# EAGLE board Driver (EAGLE 9.6.2)
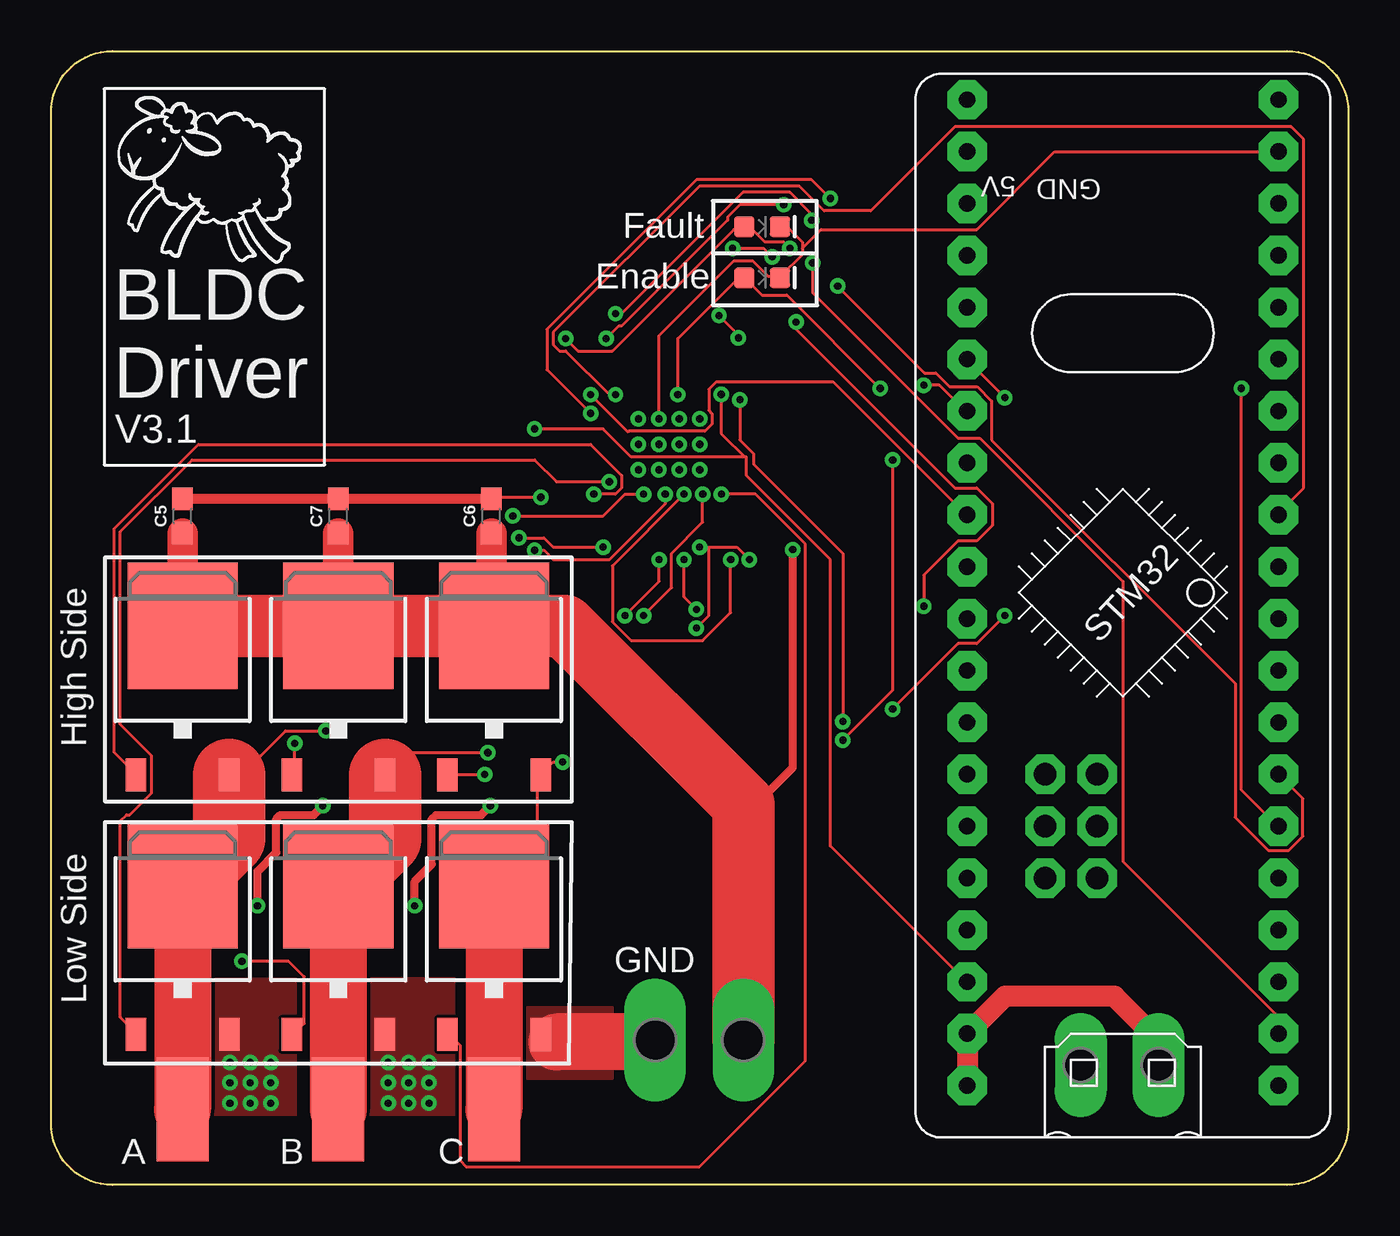
[diagram p0: board, top side]
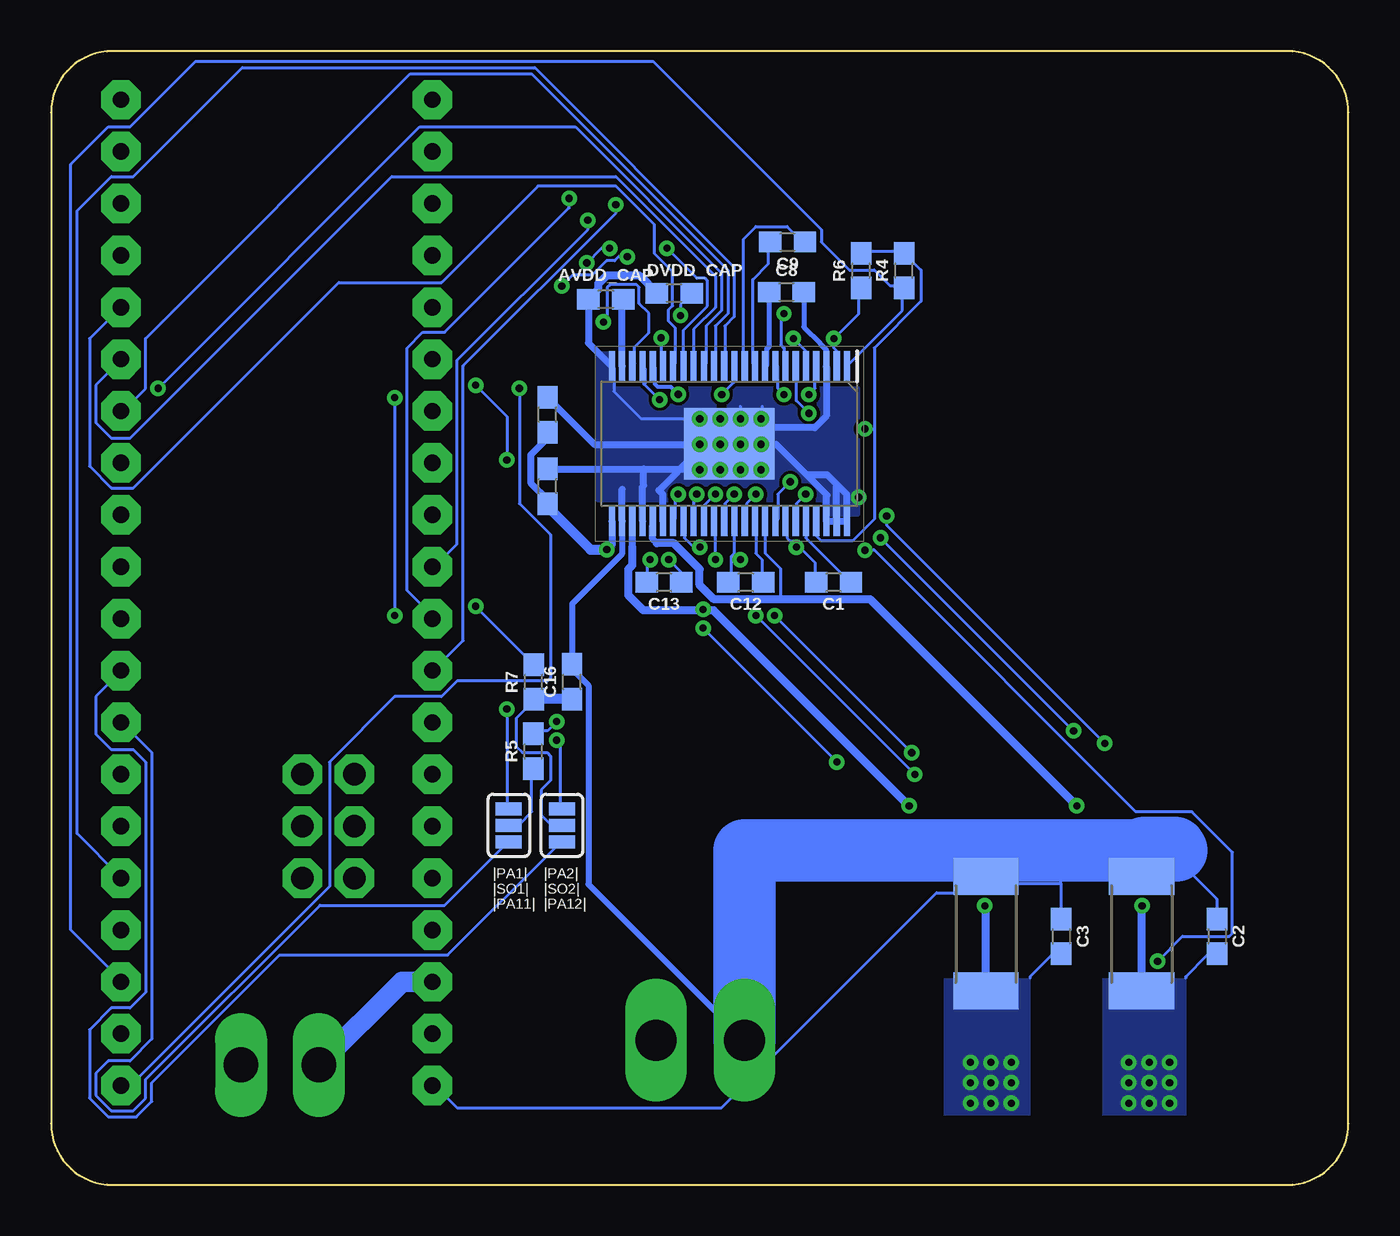
[diagram p1: board, bottom side, seen from below]

Size 63.5 x 55.5 mm. Coordinates in mm from the lower left corner, seen from the top.
Outline: 3,55.5 60.5,55.5 arc-90 63.5,52.5 63.5,3 arc-90 60.5,0 3,0 arc-90 0,3 0,52.5 arc-90 3,55.5
Copper layers (1*16): Top 0.035mm / dielectric 1.5mm / Bottom 0.035mm
Design rules "default *": minimum track width 6mil, minimum drill 0.35mm, track to track 6mil, track to pad 6mil, pad to pad 6mil, via to via 6mil, smd to smd 6mil, copper to edge 6mil, drill to drill 6mil, minimum pad ring 10mil, minimum via ring 8mil, stop-mask expansion 4mil, vias tented up to drill 3mm, thermal gap 0mil

## Footprints (pad centres in the part's own frame; a part is rotated, then mirrored left to right if it is on the bottom)
P2-38-17 = drill 1.702 pad 2.121 long: TP-1 -1.905,0; TP-2 1.905,0
SMD2,54-5,08 = smd 2.54 x 5.08: 1 0,0
0603 = smd 1.1 x 1: 1 -0.85,0; 2 0.85,0
LED-0603 = smd 1 x 1: A -0.877,0; C 0.877,0
TO252 = smd 1 x 1.6: 1 -2.28,-4.8; 2 2.28,-4.8 | smd 5.4 x 6.2: 3 0,2.5
SOP50P810X120-49N = smd 1.475 x 0.3: 1 -3.788,5.75; 2 -3.788,5.25; 3 -3.788,4.75; 4 -3.788,4.25; 5 -3.788,3.75; 6 -3.788,3.25; 7 -3.788,2.75; 8 -3.788,2.25; 9 -3.788,1.75; 10 -3.788,1.25; 11 -3.788,0.75; 12 -3.788,0.25; 13 -3.788,-0.25; 14 -3.788,-0.75; 15 -3.788,-1.25; 16 -3.788,-1.75; 17 -3.788,-2.25; 18 -3.788,-2.75; 19 -3.788,-3.25; 20 -3.788,-3.75; 21 -3.788,-4.25; 22 -3.788,-4.75; 23 -3.788,-5.25; 24 -3.788,-5.75; 25 3.788,-5.75; 26 3.788,-5.25; 27 3.788,-4.75; 28 3.788,-4.25; 29 3.788,-3.75; 30 3.788,-3.25; 31 3.788,-2.75; 32 3.788,-2.25; 33 3.788,-1.75; 34 3.788,-1.25; 35 3.788,-0.75; 36 3.788,-0.25; 37 3.788,0.25; 38 3.788,0.75; 39 3.788,1.25; 40 3.788,1.75; 41 3.788,2.25; 42 3.788,2.75; 43 3.788,3.25; 44 3.788,3.75; 45 3.788,4.25; 46 3.788,4.75; 47 3.788,5.25; 48 3.788,5.75 | smd 3.48 x 4.42: 49 0,0
R2512 = smd 1.8 x 3.2: 1 -2.8,0; 2 2.8,0
SMT-JUMPER_3_2-NC_PASTE_SILK = smd 0.635 x 1.27: 1 -0.813,0; 2 0,0; 3 0.813,0
P1-20Y = drill 2.007 pad 2.54 long: TP 0,0
BLUE_PILL_ADV = drill 0.8 pad 1.93 octagon: P$1 10.16,-30.48; P$2 10.16,-27.94; P$3 10.16,-25.4; P$4 10.16,-22.86; P$5 10.16,-20.32; P$6 10.16,-17.78; P$7 10.16,-15.24; P$8 10.16,-12.7; P$9 10.16,-10.16; P$10 10.16,-7.62; P$11 10.16,-5.08; P$12 10.16,-2.54; P$13 10.16,0; P$14 10.16,2.54; P$15 10.16,5.08; P$16 10.16,7.62; P$17 10.16,10.16; P$18 10.16,12.7; P$19 10.16,15.24; P$20 10.16,17.78; P$21 -5.08,-30.48; P$22 -5.08,-27.94; P$23 -5.08,-25.4; P$24 -5.08,-22.86; P$25 -5.08,-20.32; P$26 -5.08,-17.78; P$27 -5.08,-15.24; P$28 -5.08,-12.7; P$29 -5.08,-10.16; P$30 -5.08,-7.62; P$31 -5.08,-5.08; P$32 -5.08,-2.54; P$33 -5.08,0; P$34 -5.08,2.54; P$35 -5.08,5.08; P$36 -5.08,7.62; P$37 -5.08,10.16; P$38 -5.08,12.7; P$39 -5.08,15.24; P$40 -5.08,17.78 | drill 1.1 pad 1.93 octagon: P$42 -1.27,-20.32; P$43 -1.27,-17.78; P$44 -1.27,-15.24; P$45 1.27,-15.24; P$46 1.27,-17.78; P$47 1.27,-20.32

## Placement (x,y rotation side)
5V  TP2P2-38-17  [P2-38-17]  52.3,5.87 180 top
A  [SMD2,54-5,08]  6.44,3.7 0 top
AVDD_CAP  1.0uF  [0603]  36.35,43.35 180 bottom
B  [SMD2,54-5,08]  14.06,3.7 0 top
C  [SMD2,54-5,08]  21.68,3.7 0 top
C1  0.1uF  [0603]  25.2,29.5 180 bottom
C2  1nF  [0603]  6.44,12.17 270 bottom
C3  1nF  [0603]  14.06,12.17 270 bottom
C5  1.0uF  [0603]  6.44,32.74 90 top
C6  1.0uF  [0603]  21.55,32.74 90 top
C7  1.0uF  [0603]  14.06,32.74 90 top
C8  2.2uF  [0603]  27.5,43.7 0 bottom
C9  0.22uF  [0603]  27.45,46.15 180 bottom
C12  0.1uF  [0603]  29.5,29.5 180 bottom
C13  0.1uF  [0603]  33.5,29.5 180 bottom
C14  4.7uF  [0603]  39.2,37.7 90 bottom
C15  0.1uF  [0603]  39.2,34.2 90 bottom
C16  2.2nF  [0603]  38,24.63 90 bottom
D1  BLUE  [LED-0603]  34.8,46.9 0 top
D2  BLUE  [LED-0603]  34.8,44.4 0 top
DVDD_CAP  1.0uF  [0603]  33,43.65 0 bottom
HA  IRLR7843  [TO252]  6.44,24.87 0 top
HB  IRLR7843  [TO252]  14.06,24.87 0 top
HC  IRLR7843  [TO252]  21.68,24.87 0 top
IC1  DRV8303DCA  [SOP50P810X120-49N]  30.3,36.28 270 bottom
LA  IRLR7843  [TO252]  6.44,12.17 0 top
LB  IRLR7843  [TO252]  14.06,12.17 0 top
LC  IRLR7843  [TO252]  21.68,12.17 0 top
R1  [R2512]  10.12,12.29 270 bottom
R2  [R2512]  17.74,12.29 270 bottom
R4  10k  [0603]  21.75,44.75 90 bottom
R5  0  [0603]  39.89,21.23 90 bottom
R6  10k  [0603]  23.85,44.75 90 bottom
R7  0  [0603]  39.88,24.62 90 bottom
SO1_SELECTOR  JUMPER-SMT_3_2-NC_PASTE_SILK  [SMT-JUMPER_3_2-NC_PASTE_SILK]  41.1,17.6 270 bottom
SO2_SELECTOR  JUMPER-SMT_3_2-NC_PASTE_SILK  [SMT-JUMPER_3_2-NC_PASTE_SILK]  38.5,17.6 270 bottom
TP1  PTR1PAD1-20Y  [P1-20Y]  33.88,7.09 0 top
TP2  PTR1PAD1-20Y  [P1-20Y]  29.57,7.09 0 top
U$1  [BLUE_PILL_ADV]  49.92,35.34 0 top

## Library data of the parts
5V TP1 TP2 = testpad
A B C = wirepad
AVDD_CAP DVDD_CAP = SparkFun-Capacitors; PROD_ID: CAP-00868
C1 C12 C13 C15 = SparkFun-Capacitors; PROD_ID: CAP-00810
C2 C3 = SparkFun-Capacitors; PROD_ID: CAP-07886
C5-C7 = SparkFun-Capacitors; PROD_ID: CAP-13930
C8 = SparkFun-Capacitors; PROD_ID: CAP-07888
C9 = SparkFun-Capacitors; PROD_ID: CAP-07822
C14 = SparkFun-Capacitors; PROD_ID: CAP-14106
C16 = SparkFun-Capacitors; PROD_ID: CAP-07877
D1 D2 = SparkFun-LED; PROD_ID: DIO-08575
HA HB HC LA LB LC = BLDC project
IC1 = DRV8303DCA; ARROW_PART_NUMBER: DRV8303DCA; ARROW_PRICE-STOCK: https://www.arrow.com/en/products/drv8303dca/texas-instruments; DESCRIPTION: Texas Instruments DRV8303DCA, Three-Phase Gate Driver With Dual-Current Shunt; HEIGHT: 1.2mm; MANUFACTURER_NAME: Texas Instruments; MANUFACTURER_PART_NUMBER: DRV8303DCA; MOUSER_PART_NUMBER: 595-DRV8303DCA; MOUSER_PRICE-STOCK: https://www.mouser.co.uk/ProductDetail/Texas-Instruments/DRV8303DCA?qs=igp4D3uu33KLowzNFy6WPA%3D%3D
R1 R2 = rcl; SPICEPREFIX: R
R4 R6 = SparkFun-Resistors; PROD_ID: RES-00824
R5 R7 = SparkFun-Resistors; PROD_ID: RES-08609
SO1_SELECTOR SO2_SELECTOR = SparkFun-Jumpers
U$1 = BluePill

## Nets
GH_A: HA.1 IC1.43
GH_B: HB.1 IC1.38
GH_C: HC.1 IC1.33
GL_A: IC1.41 LA.1
GL_B: IC1.36 LB.1
GL_C: IC1.31 LC.1
GND: 5V.TP-1 AVDD_CAP.2 C2.1 C3.1 C5.2 C6.2 C7.2 C8.2 C14.2 C15.2 C16.2 D1.C D2.C DVDD_CAP.1 IC1.3 IC1.24 IC1.26 IC1.28 IC1.30 IC1.46 IC1.47 IC1.48 IC1.49 LC.2 R1.1 R2.1 TP2.TP U$1.P$19 U$1.P$21 U$1.P$22
N$1: IC1.21 R5.2
N$2: C1.1 IC1.44
N$3: IC1.22 R7.2
N$4: U$1.P$24
N$9: C12.1 IC1.39
N$14: C13.1 IC1.34
N$32: C8.1 IC1.9
N$33: C9.2 IC1.10
N$34: C9.1 IC1.11
N$40: U$1.P$20
N$43: DVDD_CAP.2 IC1.19
N$47: AVDD_CAP.1 IC1.23
PA0: U$1.P$36
PA1: SO1_SELECTOR.1 U$1.P$35
PA2: SO2_SELECTOR.1 U$1.P$34
PA3: U$1.P$33
PA4: IC1.4 U$1.P$32
PA5: IC1.7 U$1.P$31
PA6: IC1.6 U$1.P$30
PA7: IC1.5 U$1.P$29
PA8: IC1.13 U$1.P$5
PA9: IC1.15 U$1.P$6
PA10: IC1.17 U$1.P$7
PA11: SO1_SELECTOR.3 U$1.P$8
PA12: SO2_SELECTOR.3 U$1.P$9
PA15: U$1.P$10
PB0: U$1.P$28
PB1: U$1.P$27
PB3: U$1.P$11
PB4: IC1.8 U$1.P$12
PB5: U$1.P$13
PB6: IC1.14 U$1.P$14
PB7: IC1.16 U$1.P$15
PB8: IC1.18 U$1.P$16
PB9: U$1.P$17
PB10: U$1.P$26
PB11: U$1.P$25
PB12: D2.A IC1.12 U$1.P$1
PB13: D1.A IC1.2 R6.1 U$1.P$2
PB14: IC1.1 R4.1 U$1.P$3
PB15: U$1.P$4
PC13: U$1.P$39
PC14: U$1.P$38
PC15: U$1.P$37
SH_A: A.1 C1.2 HA.2 IC1.42 LA.3
SH_B: B.1 C12.2 HB.2 IC1.37 LB.3
SH_C: C13.2 C.1 HC.2 IC1.32 LC.3
SN1: C2.2 IC1.29 IC1.40 LA.2 R1.2
SN2: C3.2 IC1.27 IC1.35 LB.2 R2.2
SO1: R5.1 SO1_SELECTOR.2
SO2: C16.1 R7.1 SO2_SELECTOR.2
VCC: 5V.TP-2 IC1.20 IC1.45 R4.2 R6.2 U$1.P$23
VIN: C5.1 C6.1 C7.1 C14.1 C15.1 HA.3 HB.3 HC.3 IC1.25 TP1.TP

## Tracks (layer width: path | path; a pad name or v marks a point on that pad's centre or on a via)
GH_A  (via drill 0.35)
  Top 0.152: v26.56,33.81 27.63,33.81 27.93,34.11 27.93,34.72 26.41,36.25 7.21,36.25 3.09,32.13 3.09,21.16 4.16,20.09 HA.1
  Bottom 0.152: v26.56,33.81 27.02,33.35 27.02,32.59 IC1.43
GH_B  (via drill 0.35)
  Top 0.152: v29,33.81 28.08,33.81 27.02,32.74 v22.6,32.74 | v11.93,21.62 11.93,20.09 HB.1
  Bottom 0.152: v29,33.81 29.46,33.35 29.46,32.59 IC1.38 | v22.6,32.74 22.6,32.28 v11.93,21.62
GH_C  (via drill 0.35)
  Top 0.152: v31.89,33.81 31.89,32.44 30.37,30.91 30.37,29.24 v29,27.86 | v21.23,20.09 19.55,20.09 HC.1
  Bottom 0.152: v31.89,33.81 32.05,33.66 32.05,32.59 IC1.33 | v21.23,20.09 v29,27.86
GL_A  (via drill 0.35)
  Top 0.152: v27.32,34.42 24.73,34.42 23.66,35.48 6.9,35.48 3.4,31.98 3.4,22.53 4.92,21.01 4.92,19.18 3.85,18.11 3.7,18.11 3.4,17.81 3.4,8.21 4.16,7.44 LA.1
  Bottom 0.152: v27.32,34.42 27.93,33.81 27.93,32.59 IC1.41
GL_B  (via drill 0.35)
  Top 0.152: v30.07,33.81 30.07,33.35 27.32,30.61 24.58,30.61 24.12,31.07 v23.66,31.07 | v9.34,10.95 11.62,10.95 12.39,10.19 12.39,7.9 11.93,7.44 LB.1
  Bottom 0.152: v30.07,33.81 30.52,33.35 30.52,32.59 IC1.36 | v23.66,31.07 23.21,31.07 10.41,18.26 7.66,18.26 5.68,16.28 5.68,12.32 5.83,12.17 8.12,12.17 v9.34,10.95
GL_C  (via drill 0.35)
  Top 0.152: v32.81,33.81 34.48,33.81 36.92,31.37 36.92,6.07 31.74,0.89 20.31,0.89 20.01,1.2 20.01,6.83 19.55,7.29 LC.1
  Bottom 0.152: v32.81,33.81 32.96,33.66 32.96,32.59 IC1.31
GND  (via drill 0.35)
  Top 0.152: 6.44,33.66 C5.2 | 13.91,33.66 14.04,33.6 C7.2 14.08,33.91 | 35.55,46.76 D1.C | 21.68,33.66 21.68,33.65 C6.2 | 21.45,33.91 C6.2 | 35.86,47.07 35.7,46.91 D1.C | 44.94,4.91 U$1.P$21 | 44.94,7.35 U$1.P$22 44.94,7.5 | 54.09,5.92 5V.TP-1 | 36.77,45.85 36.77,46.15 35.86,47.07 | 36.77,45.85 36.77,45.54 35.7,44.48 D2.C 35.55,44.48 35.09,44.48 34.33,45.24 33.42,45.24 29.76,41.58 29.76,37.62 v29.75,37.5 | 35.86,47.07 D1.C | 36.77,45.85 37.69,46.76 45.31,46.76 49.12,50.57 59.94,50.57 U$1.P$19 | v23.97,33.66 21.84,33.66 C6.2
  Top 0.5: C5.2 14.04,33.59 14.04,33.6 | C7.2 C6.2 21.61,33.59 21.68,33.65
  Top 1.016: 5V.TP-1 54.21,7.08 52.05,9.24 46.69,9.24 44.86,7.4 U$1.P$22 U$1.P$21
  Top 2.794: TP2.TP 29.48,7 24.75,7
  Bottom 0.152: C2.1 6.44,13.08 6.44,14 7.66,15.22 8.43,16.39 8.5,16.5 | 14.06,16.5 14.06,16.39 14.06,14.76 | 14.06,14.76 14.06,13.08 C3.1 | 17.26,14.76 14.06,14.76 | 17.26,14.76 17.26,14.61 17.57,14.3 20.16,14.3 30.68,3.79 43.63,3.79 44.7,4.85 U$1.P$21 | 17.26,14.76 R2.1 | 28.69,34.88 v28.75,35 | IC1.49 31.89,35.03 v31.75,35 | 29.76,35.03 v29.75,35 | 29.76,38.12 29.76,37.62 v29.75,37.5 | 31.74,37.62 31.75,37.52 | 31.75,37.52 v31.75,37.5 | IC1.26 35.55,32.44 35.55,30.91 37.99,28.48 37.99,25.58 C16.2 37.99,25.43 | 33.88,43.72 DVDD_CAP.1 | 37.08,43.41 AVDD_CAP.2 | v23.97,33.66 24,33.66 | 30.98,10.8 29.57,10.8 | IC1.24 35.95,39.96 35.95,38.83 34.63,37.52 31.75,37.52 | 28.69,38.12 28.69,37.62 v28.75,37.5
  Bottom 0.25: C8.2 26.65,42 25.84,41.19 25.84,41.16 25.55,40.86 IC1.3
  Bottom 0.3: IC1.26 35.56,30.88 37.99,28.45 37.99,25.43 | C16.2 38,25.25 37.2,24.45 37.2,14.72 TP2.TP | 29.76,35.03 29.76,35.74 IC1.49 29.02,35 v28.75,35
  Bottom 0.34: 29,36.25 28.18,37.07 26.12,37.07 25.55,37.64 IC1.3
  Bottom 0.35: C15.2 34.5,35.05 | 34.5,35.05 31.95,35.05 31.12,35.88 | 31.12,35.88 v30.75,36.25 | C14.2 36.9,36.25 v31.75,36.25 | AVDD_CAP.2 37.2,41.22 IC1.24 | IC1.30 33.55,33.8 33.75,34 31.88,35.88 31.12,35.88 | IC1.28 34.55,34.2 34.5,34.25 34.5,35.05 | 26.5,34.75 25.5,33.75 25.55,33.7 IC1.46 IC1.47 | 26.5,34.75 28,36.25 29,36.25 v29.75,36.25 | IC1.47 IC1.48 24.55,33.8 25,34.25 | 26.5,34.75 25.5,34.75 25,34.25 | IC1.47 25.05,34.2 25,34.25 | IC1.26 35.55,34.05
  Bottom 0.4: DVDD_CAP.1 34.29,44.09 34.29,44.12 34.68,44.51 36.32,44.51 36.71,44.12 36.71,43.84 AVDD_CAP.2
  Bottom 1.27: R1.1 10.12,16.5 10,16.5 | R2.1 17.74,16.5
  Bottom 3.048: 29.57,10.34 TP2.TP 29.57,10.8 29.57,16.39 14.06,16.39 8.43,16.39 | 8.5,16.5 10,16.5
  other vias: 30.75,37.5 28.75,36.25 30.75,35
  pour Top: 23.25,8.7 23.25,5.2 27.5,5.2 27.5,8.7
  pour Bottom: 24,39 24,33.5 36.75,33.5 36.75,39
  pour Bottom: 35.9,38.7 35.9,40.75 36.8,40.75 36.8,38.7
  pour Bottom: 23.95,33.5 23.95,32.8 24,32.75 25.7,32.75 25.7,33.5
N$1  (via drill 0.35)
  Top 0.152: v38.75,22.68 38.75,30.91 34.38,35.28 34.38,35.8 33.71,36.47 v33.71,38.44
  Bottom 0.152: v38.75,22.68 39.21,22.23 39.82,22.23 R5.2 | 34.64,40.06 IC1.21 | 34.45,39.22 34.45,39.18 v33.71,38.44
  Bottom 0.203: IC1.21 34.45,39.97 34.45,39.22 | 33.71,38.48 v33.71,38.44
N$2
  Bottom 0.152: C1.1 24.43,29.54 26.56,31.68 26.56,32.44 IC1.44
N$3  (via drill 0.35)
  Top 0.152: v42.72,28.32 42.72,29.85 44.39,31.52 45.31,31.52 46.07,32.28 46.07,33.35 45.31,34.11 44.24,34.11 36.46,41.89 v36.46,42.24
  Bottom 0.152: v42.72,28.32 39.97,25.58 R7.2 | 36.36,42.34 v36.46,42.24 36.28,42.42 36.28,43.95 36.15,44.08 34.85,44.08 34.72,43.95 34.72,43.15 34.24,42.66 34.24,41.73 34.94,41.02 34.94,40.21 IC1.22
N$9
  Bottom 0.152: C12.1 28.69,29.54 28.69,30.61 29,30.91 29,32.44 IC1.39
N$14  (via drill 0.35)
  Top 0.152: v33.27,30.61 33.27,28.02 31.89,26.65 28.39,26.65 27.48,27.56 27.48,30.3 v30.98,33.81
  Bottom 0.152: v33.27,30.61 32.66,30 32.66,29.54 C13.1 | v30.98,33.81 31.59,33.2 31.59,32.59 IC1.34
N$32
  Bottom 0.152: 28.54,40.21 IC1.9
  Bottom 0.25: C8.1 28.35,41.05 28.48,40.92 28.48,40.14 IC1.9
N$33
  Bottom 0.152: 29,40.21 IC1.10 29.15,40.21 29.15,44.32 28.39,45.09 28.39,46 C9.2
N$34
  Bottom 0.152: C9.1 26.71,46.15 27.48,46.91 29,46.91 29.61,46.31 29.61,40.21 IC1.11
N$43  (via drill 0.35)
  Top 0.152: v32.69,42.56 33.64,41.61 v33.64,41.47
  Bottom 0.152: DVDD_CAP.2 32.69,43.11 v32.69,42.56 | v33.64,41.47 33.64,40.16 IC1.19
N$47
  Bottom 0.34: IC1.23 35.55,43.3
  Bottom 0.35: 35.6,43.25 AVDD_CAP.1 35.55,43.3
PA1  (via drill 0.35)
  Top 0.152: v41.19,23.29 44.39,26.49 45.31,26.49 v46.68,27.86 | v46.68,38.53 44.85,40.36 U$1.P$35
  Bottom 0.152: v41.19,23.29 41.19,18.42 SO1_SELECTOR.1 | v46.68,38.53 v46.68,27.86
PA2  (via drill 0.35)
  Top 0.152: v38.75,21.77 41.19,24.21 v41.19,35.48 | v42.72,39.14 43.48,39.14 44.7,37.92 U$1.P$34
  Bottom 0.152: v38.75,21.77 38.6,21.62 38.6,18.42 SO2_SELECTOR.1 | v41.19,35.48 41.19,37.62 v42.72,39.14
PA4  (via drill 0.35)
  Top 0.152: v26.41,38.69 28.24,36.86 28.27,36.89 32,36.89 32.36,37.25 32.36,37.75 32.19,37.91 32.19,38.95 32.55,39.31 38.28,39.31 44.7,32.89 U$1.P$32
  Bottom 0.152: v26.41,38.69 26.1,38.99 26.1,40.06 IC1.4
PA5  (via drill 0.35)
  Top 0.152: v27.63,42.65 27.93,42.65 33.88,48.59 36.16,48.59 37.23,47.52 v37.23,47.22
  Bottom 0.152: v27.63,42.65 27.78,42.5 27.78,41.12 27.63,40.97 27.63,40.21 IC1.7 | v37.23,47.22 37.23,46.76 43.63,40.36 43.63,31.37 44.7,30.3 U$1.P$31
PA6  (via drill 0.35)
  Top 0.152: v26.41,37.77 24.27,39.91 24.27,41.89 31.59,49.2 37.23,49.2 v38.14,48.29
  Bottom 0.152: v26.41,37.77 27.02,38.38 27.02,40.06 IC1.6 | v38.14,48.29 38.14,47.83 44.24,41.73 45.31,41.73 46.07,40.97 46.07,29.08 44.85,27.86 U$1.P$30
PA7  (via drill 0.35)
  Top 0.152: v27.17,41.43 27.78,42.04 27.93,42.04 33.11,47.22 33.11,47.37 33.72,47.98 v35.86,47.98
  Bottom 0.152: v27.17,41.43 26.56,40.82 26.56,40.21 IC1.5 | v35.86,47.98 35.86,47.57 43.32,40.1 43.32,26.65 44.7,25.27 U$1.P$29
PA8
  Bottom 0.152: IC1.13 30.52,40.21 30.52,42.04 30.07,42.5 30.07,44.93 39.82,54.69 54.15,54.69 59.48,49.35 60.55,49.35 62.22,47.68 62.22,17.2 60.09,15.06 U$1.P$5
PA9  (via drill 0.35)
  Top 0.152: v58.26,38.99 58.26,19.33 59.94,17.65 U$1.P$6
  Bottom 0.152: v58.26,38.99 45.46,51.79 37.84,51.79 30.68,44.63 30.68,42.8 31.44,42.04 31.44,40.21 IC1.15
PA10  (via drill 0.35)
  Top 0.152: v33.36,45.85 34.81,45.85 34.82,45.84 34.88,45.84 v35.29,45.43 | v38.5,44 42.75,39.75 43.3,39.75 43.98,39.07 45.34,39.07 46.03,38.37 46.03,36.47 57.95,24.55 57.95,18 59.59,16.37 60.58,16.37 61.27,17.07 61.27,18.91 U$1.P$7
  Bottom 0.152: IC1.17 32.55,41.84 31.37,43.02 31.37,44.24 31.5,44.38 31.89,44.38 v33.36,45.85 | v35.29,45.43 35.72,45.43 35.91,45.24 36.31,45.24 37.03,44.52 37.98,44.52 v38.5,44
PA11
  Bottom 0.152: SO1_SELECTOR.3 41.19,16.74 44.24,13.69 50.34,13.69 58.87,5.16 58.87,4.24 59.48,3.63 60.55,3.63 61.31,4.4 61.31,5.46 60.7,6.07 59.63,6.07 58.56,7.14 58.56,21.16 59.94,22.53 U$1.P$8
PA12
  Bottom 0.152: SO2_SELECTOR.3 38.6,16.74 44.09,11.25 52.32,11.25 58.56,5 58.56,4.09 59.33,3.33 60.7,3.33 61.61,4.24 61.61,7.6 60.55,8.66 59.63,8.66 58.87,9.43 58.87,20.7 59.48,21.31 60.55,21.31 61.31,22.07 61.31,23.9 60.09,25.12 U$1.P$9
PB4  (via drill 0.35)
  Top 0.152: v27.63,38.69 27.32,38.69 25.19,40.82 24.88,40.82 24.58,41.12 24.58,41.73 31.74,48.9 35.8,48.9 36.62,48.9 37.84,47.68 40.12,47.68 44.24,51.79 60.7,51.79 61.31,51.18 61.31,34.11 60.09,32.89 U$1.P$12
  Bottom 0.152: v27.63,38.69 27.93,38.99 27.93,40.06 IC1.8
PB6
  Bottom 0.152: IC1.14 30.98,40.21 30.98,42.04 30.37,42.65 30.37,44.78 39.97,54.38 45.91,54.38 58.87,41.43 58.87,38.99 59.94,37.92 U$1.P$14
PB7
  Bottom 0.152: IC1.16 32.05,40.21 32.05,41.89 30.98,42.95 30.98,44.48 35.86,49.35 46.83,49.35 59.63,36.55 60.55,36.55 61.31,37.31 61.31,39.14 60.09,40.36 U$1.P$15
PB8
  Bottom 0.152: IC1.18 32.96,40.21 32.96,41.97 33.3,42.31 33.3,42.81 33.07,43.03 33.07,44.7 33.97,45.59 33.97,47.01 35.86,48.9 39.67,48.9 44.39,44.17 49.42,44.17 59.48,34.11 60.55,34.11 61.61,35.18 61.61,41.43 U$1.P$16
PB12  (via drill 0.35)
  Top 0.152: v30.68,38.69 30.68,41.43 33.57,44.32 33.88,44.32 D2.A 34.03,44.32 34.79,43.56 36.01,43.56 v40.58,38.99
  Bottom 0.152: v30.68,38.69 30.07,39.3 30.07,40.06 IC1.12 | v40.58,38.99 40.58,33.35 39.06,31.83 39.06,24.82 39.21,24.66 43.63,24.66 44.39,23.9 46.68,23.9 49.88,20.7 49.88,14.61 59.48,5 59.94,5 U$1.P$1
PB13  (via drill 0.35)
  Top 0.152: v25.19,41.43 25.8,40.82 27.48,40.82 33.42,46.76 33.88,46.76 D1.A 34.19,46.9 34.94,46.15 35.86,46.15 v36.16,45.85 | v37.28,45.13 37.28,43.66 44.39,36.55 45.46,36.55 52.47,29.54 52.47,15.83 59.94,8.36 59.94,7.44 U$1.P$2
  Bottom 0.152: IC1.2 25.04,40.21 25.04,40.82 25.19,40.97 v25.19,41.43 23.97,42.65 23.97,43.87 R6.1 | v37.28,45.13 36.56,45.85 v36.16,45.85
PB14
  Bottom 0.152: IC1.1 24.43,40.21 21.84,42.8 21.84,43.87 R4.1 21.84,44.02 22.45,44.02 23.21,44.78 24.43,44.78 25.8,46.15 25.8,46.76 34.03,54.99 56.43,54.99 59.63,51.79 60.7,51.79 62.53,49.96 62.53,12.47 60.09,10.03 U$1.P$3
SH_A  (via drill 0.35)
  Top 0.152: v27.02,31.22 24.58,31.22 24.12,31.68 v22.9,31.68 | v13.45,22.23 11.47,22.23 10.25,21.01 HA.2
  Top 2.794: LA.3 A.1
  Top 3.556: HA.2 8.72,16.97 6,14.25 6.02,14.25 LA.3
  Bottom 0.152: 26.86,31.22 27.17,31.52 27.32,31.52 27.48,31.68 27.48,32.44 IC1.42 | 26.86,31.22 26.1,30.46 26.1,29.54 C1.2 | v27.02,31.22 26.86,31.22 | v13.45,22.23 v22.9,31.68
SH_B  (via drill 0.35)
  Top 0.152: v29.76,30.61 29.76,29.54 v28.08,27.86 | v21.38,21.16 17.72,21.16 HB.2
  Top 2.794: LB.3 B.1
  Top 3.556: HB.2 16.34,16.95 LB.3
  Bottom 0.152: 30.07,30.91 30.22,30.76 30.22,29.54 C12.2 | 30.07,30.91 30.07,32.44 IC1.37 | v29.76,30.61 30.07,30.91 | v21.38,21.16 v28.08,27.86
SH_C  (via drill 0.35)
  Top 0.152: v34.18,30.61 33.57,31.22 32.2,31.22 | v31.74,31.22 32.2,31.22 | LC.3 22.45,15.83 23.82,17.2 23.82,19.94 HC.2 23.97,20.09 24.58,20.7 v25.04,20.7 | 32.2,31.22 32.2,27.86 v31.59,27.26
  Top 2.794: LC.3 C.1
  Bottom 0.152: v34.18,30.61 34.33,30.46 34.33,29.54 C13.2 | v31.74,31.22 32.05,31.22 32.5,31.68 32.5,32.44 IC1.32 | v25.04,20.7 v31.59,27.26
SN1  (via drill 0.35)
  Top 0.381: v10.1,13.66 10.1,15.35 11.02,16.27 11.02,17.91 11.22,18.11 12.86,18.11 v13.3,18.55
  Bottom 0.152: C2.2 6.44,11.25 6.9,11.25 7.97,10.19 7.96,10.11 | 27.78,28.66 27.78,30.15 28.54,30.91 28.54,32.44 IC1.40 | IC1.29 34.03,32.44 34.05,32.28
  Bottom 0.35: 33.84,31.41 34.05,31.62 34.05,32.28
  Bottom 0.381: R1.2 10.12,13.64 v10.1,13.66 | v13.3,18.55 23.4,28.66 27.78,28.66 31.04,28.66 31.48,29.1 31.5,29.1 31.76,29.36 31.76,30.14 33.02,31.41 33.84,31.41
  other vias: 8.75,6 9.75,6 10.75,6 8.75,5 9.75,5 10.75,5 8.75,4 9.75,4 10.75,4
  pour Bottom: 7.96,10.11 7.96,3.41 12.03,3.41 12.03,10.11
  pour Top: 7.96,10.11 7.96,3.41 12.03,3.41 12.03,10.11
SN2  (via drill 0.35)
  Top 0.152: v30.98,30.61 30.98,28.78 v31.59,28.17
  Top 0.381: v17.8,13.66 17.8,14.86 18.64,15.69 18.64,17.91 18.84,18.11 21.06,18.11 v21.5,18.55
  Bottom 0.152: C3.2 14.06,11.25 14.52,11.25 15.59,10.19 15.58,10.11 | 30.98,32.59 IC1.35 30.98,32.44 v30.98,30.61 | 34.94,31.22 35.05,31.22 | v31.59,28.17 31.59,28.12 | IC1.27 35.09,32.44 35.05,32.28
  Bottom 0.35: 35.05,31.22 35.05,32.28
  Bottom 0.381: R2.2 17.74,13.61 v17.8,13.66 | v21.5,18.55 31.07,28.12 31.59,28.12 34.51,28.12 35.24,28.86 35.24,30.14 35.05,30.34 35.05,31.22
  other vias: 16.5,6 17.5,6 18.5,6 16.5,5 17.5,5 18.5,5 16.5,4 17.5,4 18.5,4
  pour Top: 15.58,10.14 15.58,3.41 19.77,3.41 19.77,10.14
  pour Bottom: 15.58,10.11 15.58,3.41 19.77,3.41 19.77,10.11
SO1
  Bottom 0.152: 39.98,20.4 R5.1 39.97,20.25 39.97,18.26 40.58,17.65 41.04,17.65 SO1_SELECTOR.2
SO2
  Bottom 0.152: SO2_SELECTOR.2 38.6,17.65 39.06,17.65 39.51,18.11 39.51,19.33 39.06,19.79 39.06,21.01 39.21,21.16 40.43,21.16 40.73,21.46 40.73,22.84 39.97,23.6 R7.1
  Bottom 0.5: C16.1 R7.1
VCC  (via drill 0.35)
  Top 0.152: 34.03,35.55 34.03,34.72 38.14,30.61 38.14,16.59 44.7,10.03 U$1.P$23 | 34.03,35.55 34.03,35.64 28.39,35.64 27.02,37.01 v23.66,37.01 | v32.8,38.7 32.8,36.78 34.03,35.55
  Bottom 0.152: 21.72,45.48 R4.2 | R4.2 21.84,45.7 23.82,45.7 R6.2 | 23.21,37.01 23.21,40.97 20.92,43.26 20.92,44.78 21.68,45.54 R4.2 | 23.21,37.01 23.21,32.59 24.27,31.52 25.8,31.52 26.1,31.83 26.1,32.44 IC1.45 | 34.03,40.06 IC1.20 | v23.66,37.01 23.21,37.01
  Bottom 0.203: IC1.20 33.95,39.97 33.95,39.22 33.8,39.07 33.17,39.07 v32.8,38.7
  Bottom 1: 5V.TP-2 46.33,9.94 U$1.P$23
VIN  (via drill 0.35)
  Top 0.152: 33.8,17.81 33.88,17.81 33.88,18 33.88,18.62
  Top 0.4: v36.3,31.1 36.3,20.42 33.88,18
  Top 1.5: C5.1 HA.3 | C7.1 HB.3 | C6.1 21.55,27.5 HC.3
  Top 3.048: TP1.TP 33.88,18.62 25.13,27.37 HC.3 HB.3 HA.3
  Bottom 0.34: IC1.25 36.05,31.35
  Bottom 0.35: C14.1 39.2,36.56 40.03,35.74 40.03,34.36 39.2,33.54 C15.1
  Bottom 0.38: 36.05,31.35 v36.3,31.1
  Bottom 0.5: C15.1 39.2,33.2 37.1,31.1 v36.3,31.1

## Text on the board
tPlace: 5V | GND
tNames: Fault | Enable | BLDC / Driver | V3.1 | High Side | GND | Low Side
bNames: |PA2| / |SO2| / |PA12| | |PA1| / |SO1| / |PA11|